# Altium PCB SportsLight_ASCII.PcbDoc
Units mil, origin at the board's own origin, x right, y up, seen from the top; angles counter-clockwise.
Board outline 1948.82 x 1181.1 mil, 2 copper layers (Top Layer, Bottom Layer); 64 components, 41 nets, 217 pads, 75 vias.
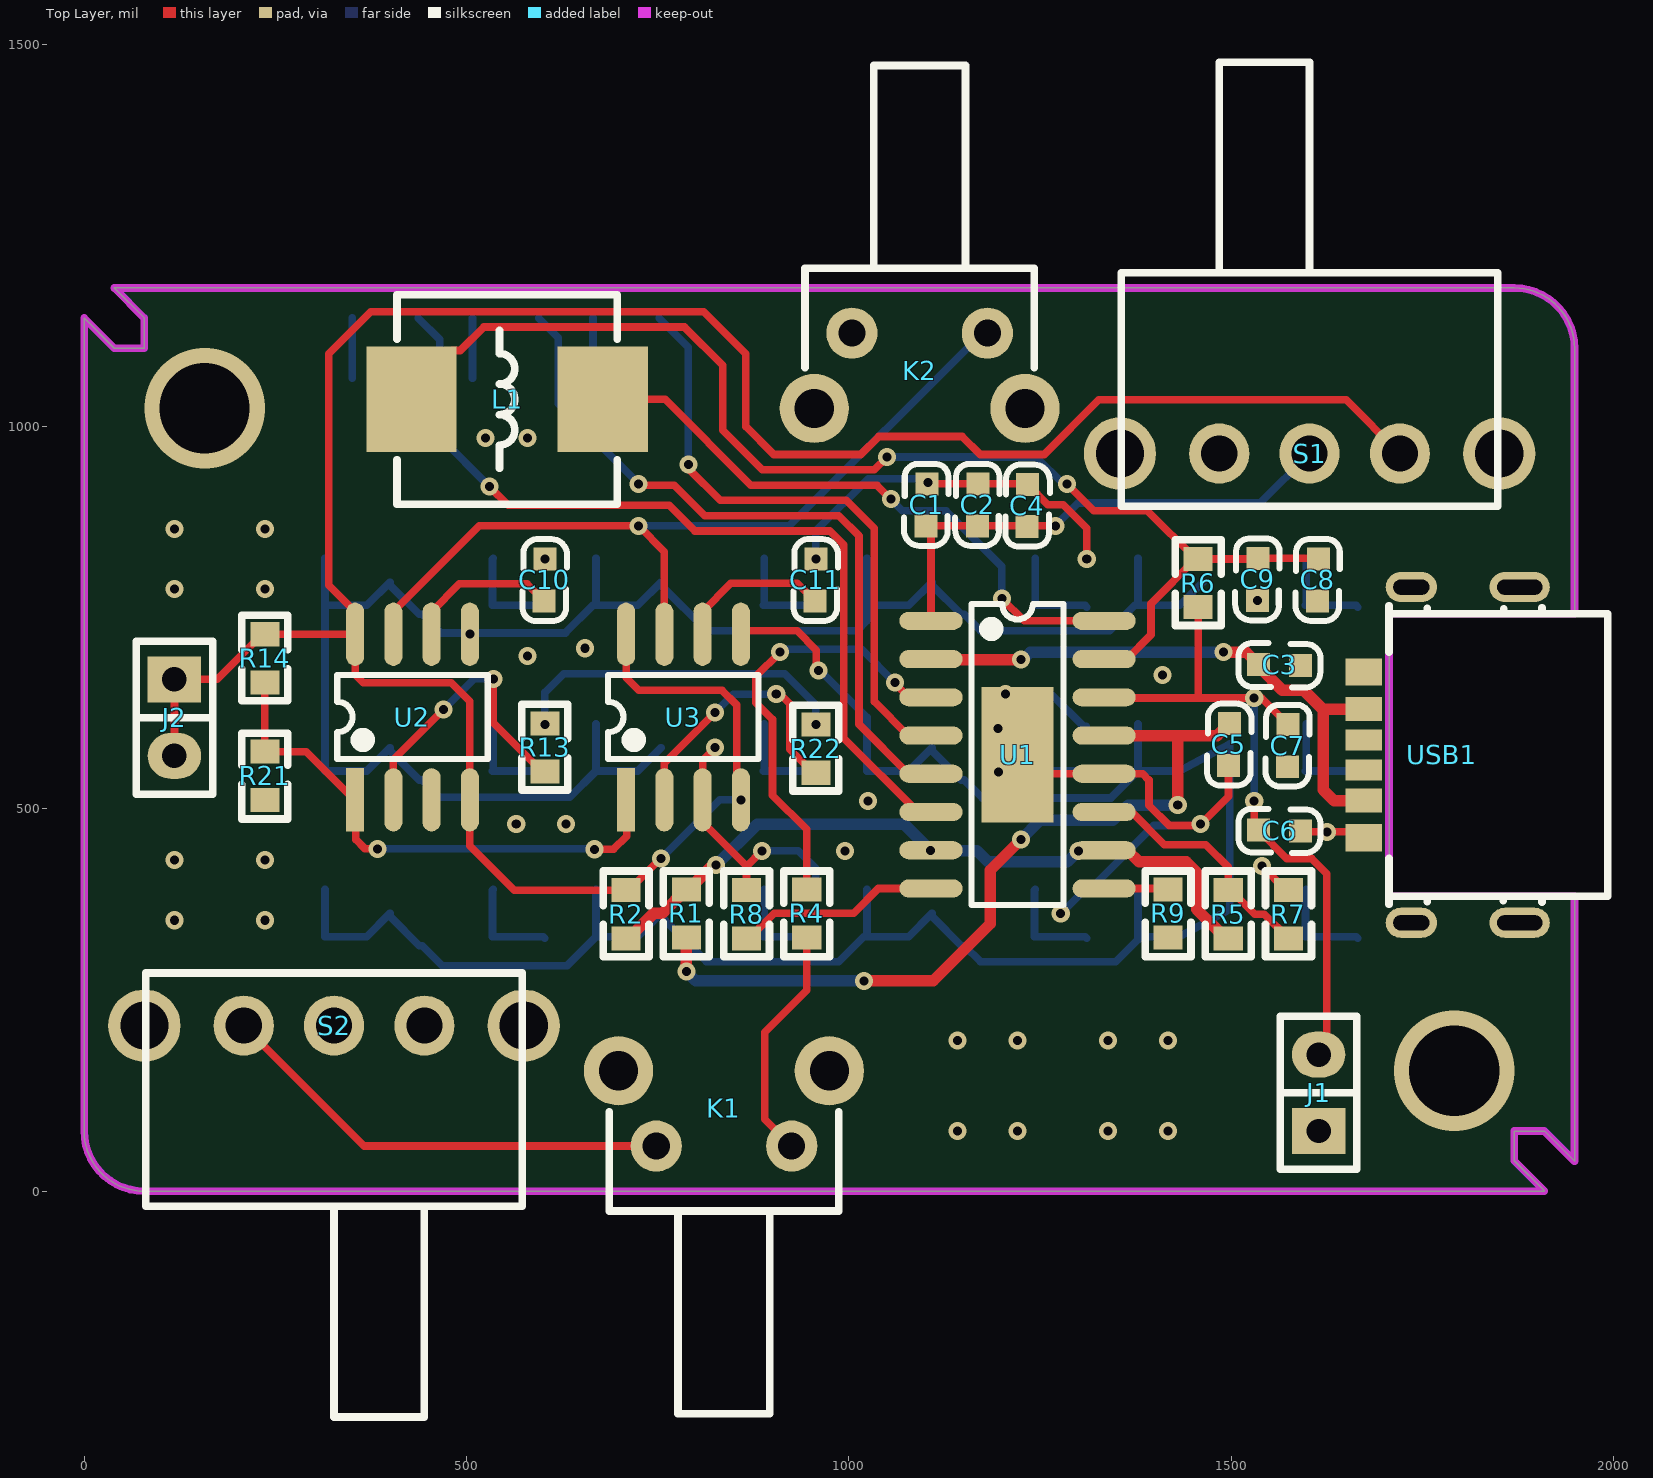
[diagram p0: Top Layer view]
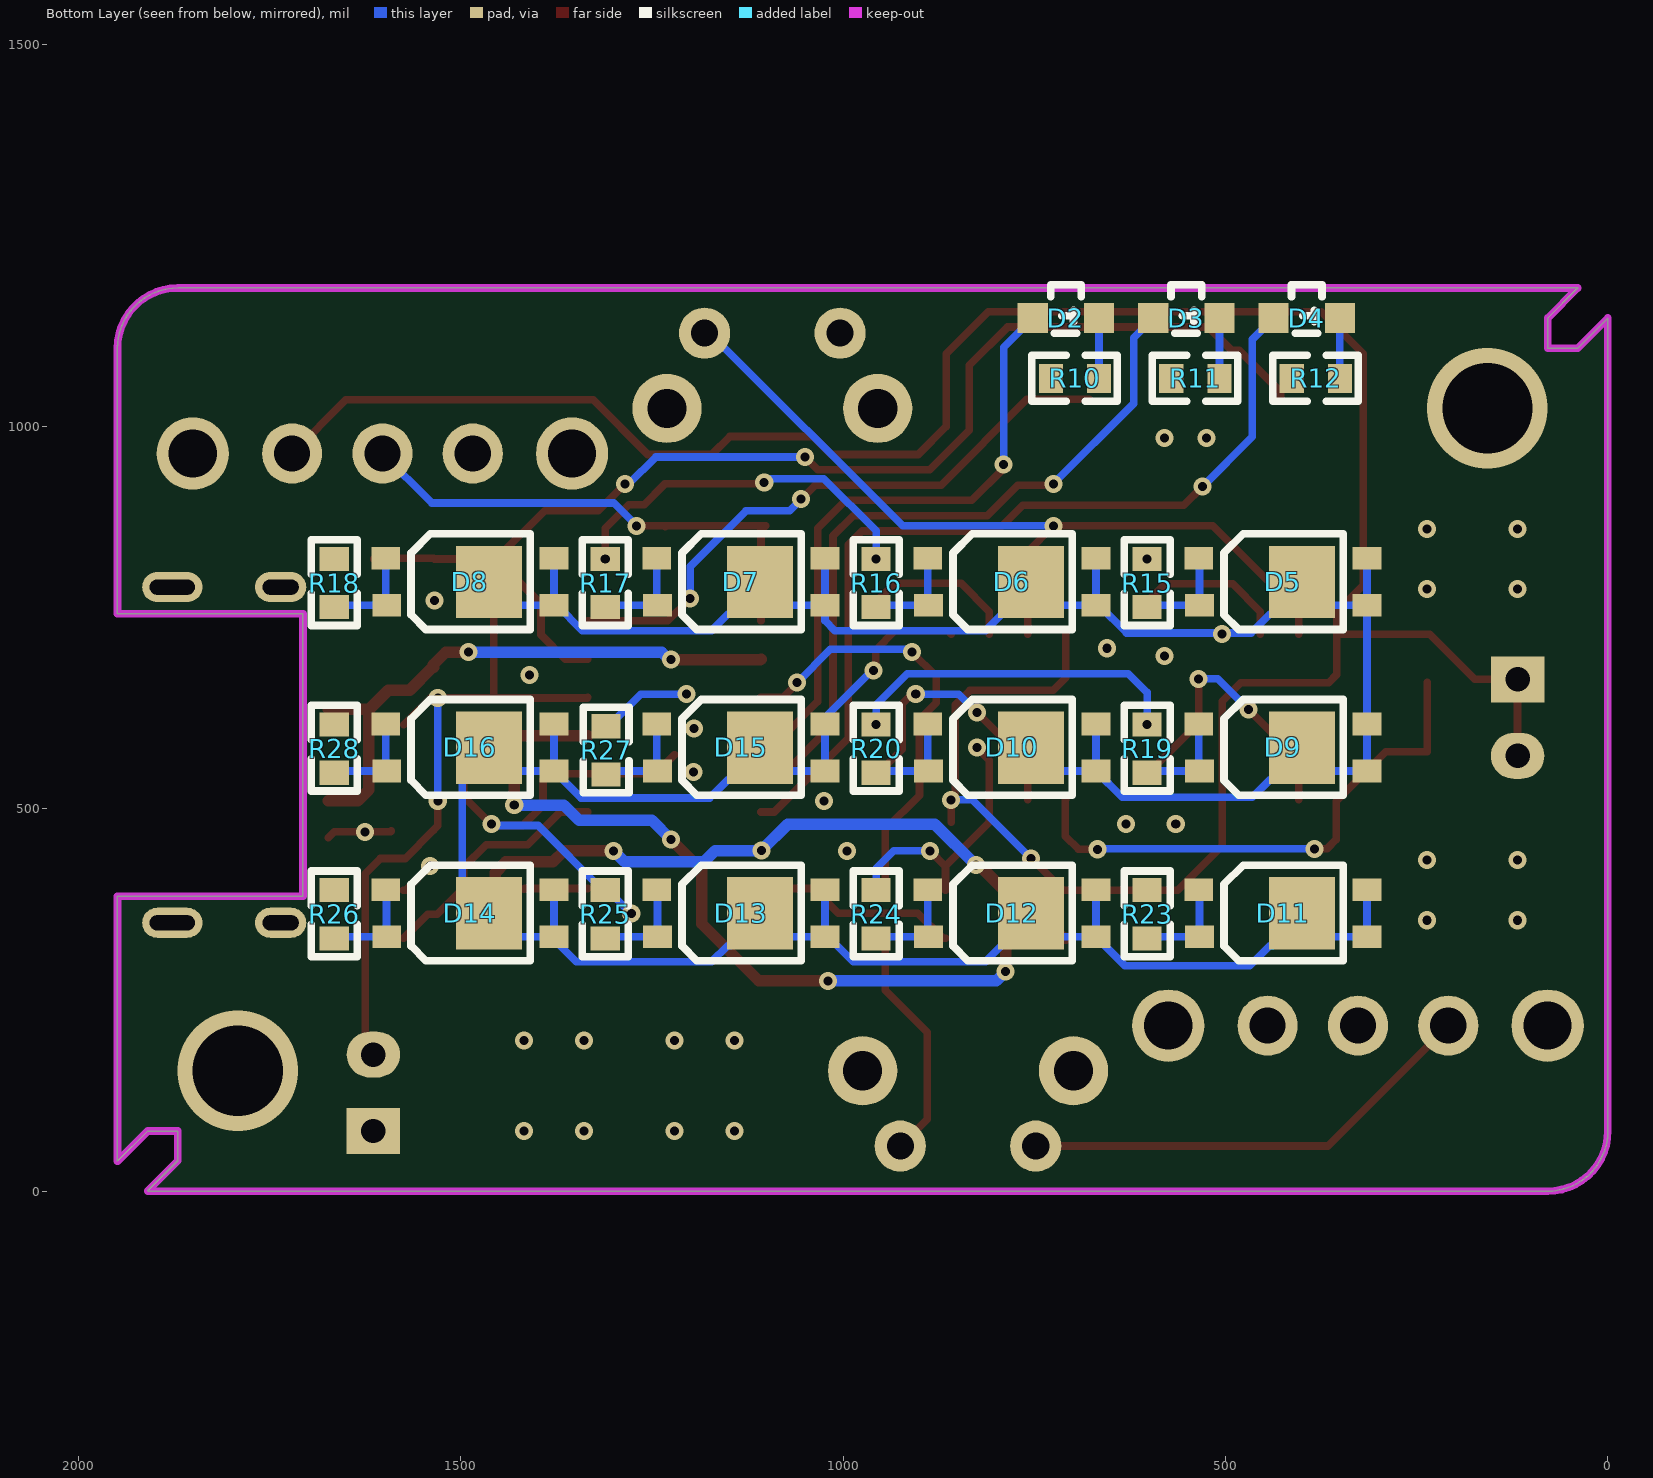
[diagram p1: Bottom Layer view, seen from below]

## Layer stack, top to bottom
Top Solder: solder mask 0.4, Solder Resist, Dk 3.5
Top Layer: signal copper 1.4
Dielectric 1: dielectric 12.6, FR-4, Dk 4.8
Bottom Layer: signal copper 1.4
Bottom Solder: solder mask 0.4, Solder Resist, Dk 3.5

## Board outline
39.37,1102.36 0,1141.73 0,78.74 ccw(c78.74,78.74) 78.74,0 1909.44,0 1909.44,0.56 1870.08,39.92 1870.08,78.74 1909.45,78.74 1948.82,39.37 1948.82,385.51 1706.3,385.51 1706.3,755 1948.82,755 1948.82,1102.36 ccw(c1870.08,1102.36) 1870.08,1181.1 39.37,1181.1 78.74,1141.73 78.74,1102.36

## Design rules (kind name [scope] priority, off if disabled: settings)
AssemblyTestPointUsage [All] p0: scope1count=1 scope1_0_kind=Board scope1_0_value=Board scope2count=1 scope2_0_kind=Board scope2_0_value=Board commentlength=0
AssemblyTestpoint [All] p0: scope1count=1 scope1_0_kind=Board scope1_0_value=Board scope2count=1 scope2_0_kind=Board scope2_0_value=Board commentlength=0
Clearance [All] p0: scope1count=1 scope1_0_kind=Board scope1_0_value=Board scope2count=1 scope2_0_kind=Board scope2_0_value=Board commentlength=0 gap=10
Clearance [All] p1: gap=10 ignorepadtopadclearanceinfootprint=TRUE except(0: Arc-Hole Track-Hole SMDPad-Hole THPad-Hole Via-Hole Fill-Hole Poly-Hole Region-Hole Text-Hole; 15: Arc-Fill Arc-Poly Arc-Region Track-Fill Track-Poly Track-Region)
ComponentClearance [All] p0: scope1count=1 scope1_0_kind=Board scope1_0_value=Board scope2count=1 scope2_0_kind=Board scope2_0_value=Board commentlength=0 gap=10 collisioncheckmode=3
DiffPairsRouting [All] p0: scope1count=1 scope1_0_kind=Board scope1_0_value=Board scope2count=1 scope2_0_kind=Board scope2_0_value=Board commentlength=0
DiffPairsRouting [All] p1: maxlimit=10 minlimit=3.5 mostfreqgap=10 toplayer_minwidth=3.5 toplayer_maxwidth=15 toplayer_prefwidth=15 bottomlayer_minwidth=3.5 bottomlayer_maxwidth=15 bottomlayer_prefwidth=15 maxuncoupledlength=500
FabricationTestPointUsage [All] p0: scope1count=1 scope1_0_kind=Board scope1_0_value=Board scope2count=1 scope2_0_kind=Board scope2_0_value=Board commentlength=0 valid=0 allowmultiple=FALSE
FabricationTestpoint [All] p0: scope1count=1 scope1_0_kind=Board scope1_0_value=Board scope2count=1 scope2_0_kind=Board scope2_0_value=Board commentlength=0 side=3 testpointundercomponent=TRUE minsize=40 maxsize=100 preferedsize=60 minholesize=0 maxholesize=40 preferedholesize=32 testpointgrid=1
FanoutControl Fanout_BGA [All] p0 off: scope1count=1 scope1_0_kind=Board scope1_0_value=Board scope2count=1 scope2_0_kind=Board scope2_0_value=Board commentlength=69 // Protel DXP Scope 1 Expression Was: IsBGA   Fanout_BGA (Default Rule)
FanoutControl Fanout_LCC [All] p0 off: scope1count=1 scope1_0_kind=Board scope1_0_value=Board scope2count=1 scope2_0_kind=Board scope2_0_value=Board commentlength=69 // Protel DXP Scope 1 Expression Was: IsLCC   Fanout_LCC (Default Rule)
FanoutControl Fanout_SOIC [All] p0 off: scope1count=1 scope1_0_kind=Board scope1_0_value=Board scope2count=1 scope2_0_kind=Board scope2_0_value=Board commentlength=71 // Protel DXP Scope 1 Expression Was: IsSOIC   Fanout_SOIC (Default Rule)
FanoutControl Fanout_Small [All] p0 off: scope1count=1 scope1_0_kind=Board scope1_0_value=Board scope2count=1 scope2_0_kind=Board scope2_0_value=Board commentlength=84 // Protel DXP Scope 1 Expression Was: (CompPinCount < 5)   Fanout_Small (Default Rule)
FanoutControl Fanout_Default [All] p0: scope1count=1 scope1_0_kind=Board scope1_0_value=Board scope2count=1 scope2_0_kind=Board scope2_0_value=Board commentlength=30 // Fanout_Default (Default Rule)
Height [All] p0: scope1count=1 scope1_0_kind=Board scope1_0_value=Board scope2count=1 scope2_0_kind=Board scope2_0_value=Board commentlength=0
HoleSize [All] p0: scope1count=1 scope1_0_kind=Board scope1_0_value=Board scope2count=1 scope2_0_kind=Board scope2_0_value=Board commentlength=0 absolutevalues=TRUE maxlimit=248.03 minlimit=7.87 maxpercent=80.000 minpercent=20.000
HoleSize [All] p1: absolutevalues=TRUE maxlimit=248.03 minlimit=7.87 maxpercent=80.000 minpercent=20.000
HoleToHoleClearance [All] p0: scope1count=1 scope1_0_kind=Board scope1_0_value=Board scope2count=1 scope2_0_kind=Board scope2_0_value=Board commentlength=0
LayerPairs [All] p0: scope1count=1 scope1_0_kind=Board scope1_0_value=Board scope2count=1 scope2_0_kind=Board scope2_0_value=Board commentlength=0 enforce=TRUE
MinimumSolderMaskSliver [All] p0: scope1count=1 scope1_0_kind=Board scope1_0_value=Board scope2count=1 scope2_0_kind=Board scope2_0_value=Board commentlength=0
MinimumSolderMaskSliver [All] p1: minsoldermaskwidth=0
NetAntennae [All] p0: scope1count=1 scope1_0_kind=Net scope1_0_value="No Net" scope2count=1 scope2_0_kind=Board scope2_0_value=Board commentlength=0
NetAntennae [InNet('No Net')] p1: netantennaetolerance=0
PasteMaskExpansion [All] p0: scope1count=1 scope1_0_kind=Board scope1_0_value=Board scope2count=1 scope2_0_kind=Board scope2_0_value=Board commentlength=0 expansion=0
PlaneClearance [All] p0: scope1count=1 scope1_0_kind=Board scope1_0_value=Board scope2count=1 scope2_0_kind=Board scope2_0_value=Board commentlength=0 clearance=20
PlaneConnect [All] p0: scope1count=1 scope1_0_kind=Board scope1_0_value=Board scope2count=1 scope2_0_kind=Board scope2_0_value=Board commentlength=0 planeconnectstyle=Relief reliefexpansion=20 reliefentries=4 reliefconductorwidth=10 reliefairgap=10
PolygonConnect [All] p0: scope1count=1 scope1_0_kind=Board scope1_0_value=Board scope2count=1 scope2_0_kind=Board scope2_0_value=Board commentlength=0 connectstyle=Relief reliefconductorwidth=10 reliefentries=4 polygonreliefangle="90 Angle"
PolygonConnect [All] p1: connectstyle=Relief reliefconductorwidth=10 reliefentries=4 polygonreliefangle="90 Angle" airgapwidth=10
RoutingCorners [All] p0: scope1count=1 scope1_0_kind=Board scope1_0_value=Board scope2count=1 scope2_0_kind=Board scope2_0_value=Board commentlength=0 cornerstyle=45-Degree minsetback=100 maxsetback=100
RoutingLayers [All] p0: scope1count=1 scope1_0_kind=Board scope1_0_value=Board scope2count=1 scope2_0_kind=Board scope2_0_value=Board commentlength=0 top layer=Automatic bottom layer=Automatic
RoutingPriority [All] p0: scope1count=1 scope1_0_kind=Board scope1_0_value=Board scope2count=1 scope2_0_kind=Board scope2_0_value=Board commentlength=0
RoutingTopology [All] p0: scope1count=1 scope1_0_kind=Board scope1_0_value=Board scope2count=1 scope2_0_kind=Board scope2_0_value=Board commentlength=0 topology=Shortest
RoutingVias [All] p0: scope1count=1 scope1_0_kind=Board scope1_0_value=Board scope2count=1 scope2_0_kind=Board scope2_0_value=Board commentlength=0 holewidth=28 width=50 viastyle="Through Hole" minholewidth=11.81 minwidth=19.68 maxholewidth=248.03 maxwidth=255.91
RoutingVias [All] p1: holewidth=28 width=50 viastyle="Through Hole" minholewidth=11.81 minwidth=19.68 maxholewidth=248.03 maxwidth=255.91
ShortCircuit [All] p0: scope1count=1 scope1_0_kind=Board scope1_0_value=Board scope2count=1 scope2_0_kind=Board scope2_0_value=Board commentlength=0 allowed=FALSE
SilkToBoardRegionClearance [All] p0: scope1count=1 scope1_0_kind=Board scope1_0_value=Board scope2count=1 scope2_0_kind=Board scope2_0_value=Board commentlength=0
SilkToSilkClearance [All] p0: scope1count=1 scope1_0_kind=Board scope1_0_value=Board scope2count=1 scope2_0_kind=Board scope2_0_value=Board commentlength=0
SilkToSolderMaskClearance [All] p0 off: scope1count=1 scope1_0_kind=Board scope1_0_value=Board scope2count=1 scope2_0_kind=Board scope2_0_value=Board commentlength=44 // Protel DXP Scope 1 Expression Was: IsPad
SilkToSolderMaskClearance [IsPad] p1: minsilkscreentomaskgap=0 clearancetoexposedcopper=TRUE
SolderMaskExpansion [All] p0: scope1count=1 scope1_0_kind=Board scope1_0_value=Board scope2count=1 scope2_0_kind=Board scope2_0_value=Board commentlength=0 expansion=4
SolderMaskExpansion [All] p1: expansion=4
UnRoutedNet [All] p0: scope1count=1 scope1_0_kind=Board scope1_0_value=Board scope2count=1 scope2_0_kind=Board scope2_0_value=Board commentlength=0
UnpouredPolygon [All] p0: scope1count=1 scope1_0_kind=Board scope1_0_value=Board scope2count=1 scope2_0_kind=Board scope2_0_value=Board commentlength=0
Width [All] p0: scope1count=1 scope1_0_kind=Board scope1_0_value=Board scope2count=1 scope2_0_kind=Board scope2_0_value=Board commentlength=0 maxlimit=30 minlimit=3.5 preferedwidth=10
Width [All] p1: maxlimit=30 minlimit=3.5 preferedwidth=10
25 further rules are at their usual default settings.

## Components (designator, comment, footprint, x,y, rotation, side; value= is the part's Value field where it differs from the comment)
C1 "22uF" 0603C 1102.36,925.2 r270 top locked
C2 "22uF" 0603C 1169.29,925.2 r270 top
C3 "10uF" 0603C 1535.43,688.98 r0 top
C4 "10uF" 0603C 1232.28,868.93 r90 top locked
C5 "2.2uF" 0603C 1496.06,556.54 r90 top
C6 "10uF" 0603C 1535.43,472.44 r0 top locked
C7 "0.1uF" 0603C 1574.8,610.24 r270 top
C8 "0.1uF" 0603C 1614.17,826.98 r270 top locked
C9 "10uF" 0603C 1535.43,827.73 r270 top locked
C10 "MODE" 0603C 601.01,771.56 r90 top
C11 "MODE" 0603C 955.34,771.56 r90 top
D2 "" LED-0602-RD 708.66,1141.73 r180 bottom locked
D3 "LED" LED-0602-RD 551.18,1141.73 r180 bottom locked
D4 "LED" LED-0602-RD 393.7,1141.73 r180 bottom locked
D5 "LED-5630" LED-5630W 314.96,826.77 r180 bottom locked
D6 "LED-5630" LED-5630W 669.29,826.77 r180 bottom locked
D7 "LED-5630" LED-5630W 1023.62,826.77 r180 bottom locked
D8 "LED-5630" LED-5630W 1377.95,826.77 r180 bottom locked
D9 "LED-5630" LED-5630W 314.96,610.24 r180 bottom locked
D10 "LED-5630" LED-5630W 669.29,610.24 r180 bottom locked
D11 "LED-5630" LED-5630W 314.96,393.7 r180 bottom locked
D12 "LED-5630" LED-5630W 669.29,393.7 r180 bottom locked
D13 "LED-5630" LED-5630W 1023.62,393.7 r180 bottom locked
D14 "LED-5630" LED-5630W 1377.95,393.7 r180 bottom locked
D15 "LED-5630" LED-5630W 1023.62,610.24 r180 bottom locked
D16 "LED-5630" LED-5630W 1377.95,610.24 r180 bottom locked
J1 "BAT" "Pin HDR1X2/2.54mm-S" 1614.17,78.74 r180 top
J2 "CE" "Pin HDR1X2/2.54mm-S" 118.11,669.29 r0 top locked
K1 "KEY" DIP-6X6X10_C 748.03,59.06 r0 top locked
K2 "KEY" DIP-6X6X10_C 1181.1,1122.05 r180 top locked
L1 "1uH" 0630L 433.07,1035.43 r0 top locked
R1 "0R" 0603R 787.4,331.7 r90 top locked
R2 "0R" 0603R 708.66,393.7 r270 top locked
R4 "10K" 0603R 944.88,331.7 r90 top locked
R5 "MODE" 0603R 1496.06,393.7 r270 top
R6 "10mR" 0603R 1456.69,826.77 r270 top locked
R7 "MODE" 0603R 1574.8,393.7 r270 top
R8 "MODE" 0603R 866.14,393.7 r270 top locked
R9 "MODE" 0603R 1417.32,331.7 r90 top locked
R10 "100R" 0603R 728.35,1062.99 r180 bottom locked
R11 "100R" 0603R 570.87,1062.99 r180 bottom locked
R12 "100R" 0603R 413.39,1062.99 r180 bottom locked
R13 "MODE" 0603R 602.36,611.73 r270 top
R14 "MODE" 0603R 236.22,728.35 r270 top locked
R15 "MODE" 0603R 602.36,826.77 r270 bottom locked
R16 "MODE" 0603R 956.69,826.77 r270 bottom locked
R17 "MODE" 0603R 1311.02,826.77 r270 bottom locked
R18 "MODE" 0603R 1665.35,826.77 r270 bottom locked
R19 "MODE" 0603R 602.36,610.24 r270 bottom locked
R20 "MODE" 0603R 956.69,610.24 r270 bottom locked
R21 "MODE" 0603R 236.22,511.81 r90 top locked
R22 "MODE" 0603R 956.69,610.24 r270 top
R23 "MODE" 0603R 602.36,393.7 r270 bottom locked
R24 "MODE" 0603R 956.69,393.7 r270 bottom locked
R25 "MODE" 0603R 1311.02,393.7 r270 bottom locked
R26 "MODE" 0603R 1665.35,393.7 r270 bottom locked
R27 "MODE" 0603R 1310,607.99 r270 bottom
R28 "MODE" 0603R 1665.35,610.24 r270 bottom locked
S1 "SS-12F23" SS-12F23 1850.39,964.57 r180 top locked
S2 "SS-12F23" SS-12F23 78.74,216.54 r0 top locked
U1 "IP5506" ESOP16 1220.47,570.87 r0 top locked
U2 "CN5730" SOP8 354.33,511.81 r90 top locked
U3 "CN5730" SOP8 708.66,511.81 r90 top locked
USB1 "USB-C 6P CB0.8(073)" USB-C-SMD_TYPE-C-6P-CB0.8-073 1673.23,462.24 r90 top

## Footprints (in the part's own frame and the unit in brackets; to place one, negate y for a bottom-side part, rotate by r counter-clockwise, add the part's x,y. Pads: shape width x height; smd on the part's side, far side on the other; paste and mask are expansions set on the pad)
0603C [mil]
  rect 30x30 smd: 1(0.21,-0.35) 2(55.21,-1.35)
  silkscreen extent -26,-30 81,28
0603R [mm]
  rect 0.8x0.965 smd: 1(0,0) 2(1.6,0)
  silkscreen extent -0.64,-0.76 2.21,0.76
0630L [mm]
  rect 3x3.5 smd: 1(-0.127,0) 2(6.223,0)
  silkscreen extent -0.61,-3.48 6.71,3.48
DIP-6X6X10_C [mm]
  round 2.3 hole 1.3: 0(-1.25,2.5) 0(5.75,2.5)
  round 1.7 hole 0.9: 1(0,0) 3(4.5,0)
  silkscreen extent -1.56,-8.89 6.06,1.14
ESOP16 [mm]
  oval 2.1x0.6 smd: 1(-2.875,4.445) 2(-2.875,3.175) 3(-2.875,1.905) 4(-2.875,0.635) 5(-2.875,-0.635) 6(-2.875,-1.905) 7(-2.875,-3.175) 8(-2.875,-4.445) 9(2.875,-4.445) 10(2.875,-3.175) 11(2.875,-1.905) 12(2.875,-0.635) 13(2.875,0.635) 14(2.875,1.905) 15(2.875,3.175) 16(2.875,4.445)
  rect 0.9x0.7 on Top Paste: 10(-0.625,-0.575) 10(-0.625,0.525) 10(-0.625,1.625) 10(0.625,-1.625) 11(-0.65,-1.625) 11(0.65,-0.575) 11(0.65,0.525) 11(0.65,1.625)
  rect 2.4x4.5 smd paste-3: 17(0,0)
  silkscreen extent -1.52,-5 1.52,5
LED-0602-RD [mm]
  rect 1x1 smd: 1(-1.1,0) 2(1.1,0)
  silkscreen extent -0.51,-0.51 0.51,1.11
LED-5630W [mm]
  rect 2.2x2.4 smd: A(-2.159,-0.768)
  rect 0.95x0.75 smd: A(0,-1.543) A(0,0.019) K(-5.588,0.019) K(-5.563,-1.543)
  silkscreen extent -4.75,-2.34 -0.79,0.83
"Pin HDR1X2/2.54mm-S" [mil]
  rect 70x60 hole 32: 1(0,0)
  oval 70x60 hole 32: 2(0,-100)
  silkscreen extent -50,-150 50,50
SOP8 [mm]
  rect 2.1x0.6 smd: 1(0,0)
  oval 2.1x0.6 smd: 2(0,-1.27) 3(0,-2.54) 4(0,-3.81) 5(5.5,-3.81) 6(5.5,-2.54) 7(5.5,-1.27) 8(5.5,0)
  silkscreen extent 1.35,-4.41 4.15,0.6
SS-12F23 [mm]
  round 2.4 hole 1.6: 0(0,0) 0(12.6,0)
  round 2 hole 1.2: 1(3.3,0) 2(6.3,0) 3(9.3,0)
  silkscreen extent 0.05,-13 12.55,1.75
USB-C-SMD_TYPE-C-6P-CB0.8-073 [mm]
  rect 0.9x1.2 smd: 1(0,0) 6(5.5,0)
  rect 0.8x1.2 smd: 2(1.23,0) 5(4.27,0)
  rect 0.7x1.2 smd: 3(2.25,0) 4(3.25,0)
  oval 1x1.7 hole 0.5 slot 1.2 at 90 deg: 7(-2.825,-1.58) 8(8.325,-1.58)
  oval 1x2 hole 0.5 slot 1.5 at 90 deg: 7(-2.825,-5.18) 8(8.325,-5.18)
  silkscreen extent -2.21,-8.11 7.71,-0.84

## Part data
C1 C2 C3 C4 C5 C6 C7 C8 C9 C10 C11: library part CAP, "无极性电容"
D2: library part LED
J1 J2: library part "Pin HDR1X2"
L1: library part INDUCTOR, "INDUCTOR"
R1 R2 R4 R5 R6 R7 R10 R11 R12 R13 R14 R15 R16 R17 R18 R19 R20 R21 R22 R23 R24 R25 R26 R27 R28: library part RES
R8: library part RES, "用于设置电池容量"
R9: library part RES, "用于设置按键功能、照明"
U1: "集成数码管驱动的2A充电2.4A放电移动电源SOC"
U2 U3: "LED集成驱动电路"

## Via types
v1: diameter 23.62, hole 11.81, Top Layer to Bottom Layer, 73 vias
v2: diameter 157.48, hole 118.11, Top Layer to Bottom Layer, 2 vias

## Nets (pads, with @x,y where several pads share a name; then routed paths per layer and width w, separated by ;. In a path a pad name is that pad's centre, name@x,y a point inside that pad or via, vN(x,y) a via of type N, cw(c..) or ccw(c..) an arc to the next point about the centre after c; other vN are vias at no path point)
BTN: K2.1 U2.7 U3.7 | length 1112.7
  Top Layer w10: U2.7 404.33,757.87 516.46,870 v1(725,870) 758.66,836.34 U3.7
  Bottom Layer w10: v1(725,870) 922.08,870 1174.13,1122.05 K2.1
CE0: J2.1 J2.2 R2.1 R14.1 S1.1 U2.4 U2.8 U3.4 U3.8 | length 3581.6
  Top Layer w10: J2.2 J2.1 173.92,669.29 232.97,728.35 R14.1 U2.8 ; U3.8 708.66,671.34 725,655 834,655 853.19,635.81 853.19,517.29 v1(858.66,511.81) U3.4@858.66,482.28 ; v1(754.1,435) 753.21,435 711.91,393.7 R2.1 562.24,393.7 504.33,451.61 U2.4 504.33,640.67 480,665 365,665 354.33,675.67 U2.8 ; S1.1 1650.04,1035 1326.94,1035 1255.28,963.35 1171.65,963.35 1148.19,986.81 1038.89,986.81 1015.43,963.35 901.65,963.35 865,1000 865,1095 810,1150 375,1150 320,1095 320,792.2 354.33,757.87 U2.8
  Bottom Layer w10: v1(754.1,435) 830.92,511.81 v1(858.66,511.81)
GND: C1.1 C2.1 C3.2 C4.2 C5.1 C6.2 C7.2 C8.2 C9.2 C10.2 C11.2 J1.1 K2.3 R7.1 R8.1 R9.1 R10.1 R11.1 R12.1 R13.1 R15.1 R16.1 R17.1 R18.1 R19.1 R20.1 R21.1 R22.1 R23.1 R24.1 R25.1 R26.1 R27.1 R28.1 S2.2 U1.12 U1.17 U2.3 U3.3 USB1.1 USB1.6 USB1.7 USB1.8 | length 2168.2
  Top Layer w10: v1(825,580) 808.66,563.66 U3.3 808.66,482.28 866.14,424.81 ; R8.1 866.14,424.81 ; v1(886.58,445) 886.34,445 866.14,424.81 ; C1.1 C2.1 1232.8,924.98 C4.2 1260.16,897.63 1280.29,897.63 1311.02,866.89 v1(1311.02,826.77) ; U1.17 1245.47,545.87 U1.12 1384.13,545.87 1392.35,537.65 1392.35,504.74 1418.89,478.19 1458.19,478.19 v1(1460,480) 1496.42,516.42 C5.1 ; v1@1539.95,426.45 v1(1539.95,425.3) 1571.55,393.7 R7.1 ; C6.2 1591.73,470 v1(1625,470) 1665.47,470 USB1.1
  Bottom Layer w10: v1(602.36,610.24) 602.36,652.05 627.12,676.81 916.11,676.81 956.69,636.22 v1(956.69,610.24) ; v1(886.58,445) 933.75,445 956.69,422.05 R24.1 ; v1(956.69,826.77) 956.69,863.39 1025.12,931.81 1095.18,931.81 v1@1102.01,924.98 ; v1(1205,650) 1264.74,650 1306.75,607.99 R27.1 ; v1(1276.98,362.9) 1307.78,393.7 R25.1 1314.27,393.7 1398.76,478.19 1458.19,478.19 v1(1460,480)
  other v1: 118.11,354.33 236.22,354.33 118.11,433.07 236.22,433.07 995,445 565,480 630,480 1025,510 1195.87,548.23 1195,605 1410,675 580,700 655,710 1534.08,772.52 118.11,787.4 236.22,787.4 602.36,826.77 118.11,866.14 236.22,866.14 1103.12,926.69 525,985 580,985
  other v2: 1791.34,157.48 157.48,1023.62
LED4: D3.1 U1.5 | length 954.4
  Top Layer w10: v1(725,925) 726.65,923.35 771.65,923.35 811.65,883.35 986.65,883.35 1013.19,856.81 1013.19,610.43 1077.76,545.87 U1.5
  Bottom Layer w10: D3.1 620,1116.22 620,1030 v1(725,925)
LED5: D2.1 U1.4 | length 807
  Top Layer w10: v1(790,950) 790,945 831.65,903.35 996.65,903.35 1033.19,866.81 1033.19,640.43 1077.76,595.87 U1.4
  Bottom Layer w10: D2.1 790,1103.7 v1(790,950)
MODE: R14.2 R21.2 U2.1 U3.1 | length 700.7
  Top Layer w10: R14.2 R21.2 290.2,574.8 355,510 355,460 367.23,447.77 v1(383.61,447.77) ; v1(667.14,447.14) 692.14,447.14 709.33,464.33 709.33,511.14 U3.1
  Bottom Layer w10: v1(383.61,447.77) 666.5,447.77 v1(667.14,447.14)
NetC1_2: C1.2 C2.2 C4.1 S1.2 U1.1 | length 668.5
  Top Layer w10: U1.1 1107.28,863.71 C1.2 C2.2 C4.1@1233.49,870 ; C4.1 C4.1@1233.49,870 ; v1(1270,870) C4.1@1233.49,870
  Bottom Layer w10: v1(1270,870) 1300,900 1537.8,900 S1.2
NetC6_1: C6.1 C7.1 J1.2 R6.2 U1.14 | length 902.5
  Top Layer w10: U1.14 1334.53,645 v1(1530,645) 1539.47,645 C7.1 ; 1456.69,645.87 R6.2 ; v1(1530,510) 1530,477.73 C6.1 1572.73,435 1605,435 1625,415 1625,189.57 J1.2
  Bottom Layer w10: v1(1530,510) v1(1530,645)
NetC8_1: C8.1 C9.1 L1.1 R6.1 U1.15 | length 1615.1
  Top Layer w10: L1.1 428.07,1045.28 482.13,1099.33 491.97,1099.33 522.64,1130 785,1130 835,1080 835,995 886.65,943.35 1033.35,943.35 v1(1050,960) ; v1(1285,925) 1320,890 1390.22,890 1453.45,826.77 1395,768.33 1395,727.68 1363.19,695.87 U1.15 ; R6.1 1534.33,826.77 C9.1 1613.07,827.52 C8.1
  Bottom Layer w10: v1(1050,960) 1245,960 1280,925 v1(1285,925)
NetC10_1: C10.1 U2.6 | length 200.9
  Top Layer w10: U2.6 454.33,757.87 490.6,794.15 578.99,794.15 C10.1
NetC11_1: C11.1 U3.6 | length 201.6
  Top Layer w10: U3.6 808.66,757.87 845.79,795 932.46,795 C11.1
NetD2_K: D2.2 R10.2 | length 78.7
  Bottom Layer w10: R10.2 D2.2
NetD3_K: D3.2 R11.2 | length 78.7
  Bottom Layer w10: R11.2 D3.2
NetD4_A: D4.1 U1.6 | length 1161.9
  Top Layer w10: v1@530,920 v1(530,921.5) 554.69,896.81 765,896.81 798.46,863.35 975.12,863.35 993.19,845.28 993.19,592.52 1089.84,495.87 U1.6
  Bottom Layer w10: D4.1 465,1113.74 465,986.5 v1(530,921.5)
NetD4_K: D4.2 R12.2 | length 78.7
  Bottom Layer w10: R12.2 D4.2
NetD5_A: D5.A D6.A D7.A D8.A D9.A D10.A U2.5 | length 2372.5
  Bottom Layer w10: D5.A@314.96,827.52 D5.A@314.96,766.02 ; D9.A@400.46,579.49 D9.A@399.96,579.99 ; D10.A@669.29,610.99 D10.A@669.29,549.49 ; D6.A@669.29,827.52 D6.A@669.29,766.02 ; D10.A@754.29,579.99 723.79,549.49 D10.A@669.29,549.49 ; D7.A@1023.62,827.52 D7.A@1023.62,766.02 ; D8.A@1377.95,827.52 D8.A@1377.95,766.02 ; D8.A@1462.95,796.52 1432.45,766.02 D8.A@1377.95,766.02 ; D5.A@314.96,766.02 369.46,766.02 399.96,796.52 399.96,792.59 438.27,754.28 442.2,754.28 466.48,730 629.33,730 665.36,766.02 D6.A@669.29,766.02 ; D5.A@314.96,766.02 314.96,610.99 314.96,549.49 369.46,549.49 D9.A@399.96,579.99 ; D9.A@399.96,579.99 399.96,576.05 438.27,537.74 442.2,537.74 464.95,515 634.81,515 D10.A@669.29,549.49 ; D6.A@669.29,766.02 723.79,766.02 754.29,796.52 754.29,792.59 813.85,733.03 1010.72,733.03 1023.62,745.94 D7.A@1023.62,766.02 ; D7.A@1023.62,766.02 1078.12,766.02 1108.62,796.52 1108.62,792.59 1146.93,754.28 1150.87,754.28 1172.11,733.03 1341.03,733.03 1374.01,766.02 D8.A@1377.95,766.02
  other v1: 504.33,728.35
NetD5_K: D5.K R15.2 | length 131.2
  Bottom Layer w10: D5.K@534.96,827.52 533.96,826.52 533.96,766.02 600.12,766.02 R15.2
NetD6_K: D6.K R16.2 | length 131.2
  Bottom Layer w10: D6.K@889.29,827.52 889.29,767.02 888.29,766.02 954.45,766.02 R16.2
NetD7_K: D7.K R17.2 | length 131.2
  Bottom Layer w10: D7.K@1243.62,827.52 1243.62,767.02 1242.62,766.02 1308.78,766.02 R17.2
NetD8_K: D8.K R18.2 | length 131.2
  Bottom Layer w10: D8.K@1597.95,827.52 1597.95,767.02 1596.95,766.02 1663.11,766.02 R18.2
NetD9_K: D9.K R19.2 | length 131.2
  Bottom Layer w10: D9.K@534.96,610.99 534.96,550.49 533.96,549.49 600.12,549.49 R19.2
NetD10_K: D10.K R20.2 | length 131.2
  Bottom Layer w10: D10.K@889.29,610.99 889.29,550.49 888.29,549.49 954.45,549.49 R20.2
NetD11_A: D11.A D12.A D13.A D14.A D15.A D16.A U3.5 | length 2725.4
  Top Layer w10: U3.5 863.06,732.75 932.25,732.75 957.51,707.49 957.51,683.16 v1(960,680.68)
  Bottom Layer w10: D11.A@314.96,394.45 314.96,332.95 369.46,332.95 399.96,363.45 399.96,359.51 438.27,321.21 442.2,321.21 468.41,295 631.34,295 D12.A@669.29,332.95 ; D12.A@669.29,394.45 D12.A@669.29,332.95 ; v1(960,680.68) 962.5,680.68 1023.62,619.55 1023.62,610.99 1023.62,549.49 1078.12,549.49 1108.62,579.99 1108.62,576.05 1146.93,537.74 1150.87,537.74 1174.36,514.25 1342.72,514.25 D16.A@1377.95,549.49 ; D13.A@1023.62,394.45 D13.A@1023.62,332.95 ; D14.A@1377.95,394.45 D14.A@1377.95,332.95 ; D16.A@1377.95,610.99 D16.A@1377.95,549.49 ; D12.A@669.29,332.95 723.79,332.95 754.29,363.45 754.29,359.51 813.85,299.96 986.69,299.96 1019.68,332.95 D13.A@1023.62,332.95 ; D13.A@1023.62,332.95 1078.12,332.95 1108.62,363.45 1108.62,359.51 1146.93,321.21 1150.87,321.21 1172.11,299.96 1349.14,299.96 1377.95,328.77 D14.A@1377.95,332.95 ; D14.A@1377.95,332.95 1432.45,332.95 1468.8,352.65 1497.95,368.45 1497.95,584.99 1468.8,569.19 1432.45,549.49 D16.A@1377.95,549.49
NetD11_K: D11.K R23.2 | length 131.2
  Bottom Layer w10: D11.K@534.96,394.45 533.96,393.45 533.96,332.95 600.12,332.95 R23.2
NetD12_K: D12.K R24.2 | length 131.2
  Bottom Layer w10: D12.K@889.29,394.45 889.29,333.95 888.29,332.95 954.45,332.95 R24.2
NetD13_K: D13.K R25.2 | length 131.2
  Bottom Layer w10: D13.K@1243.62,394.45 1242.62,393.45 1242.62,332.95 1308.78,332.95 R25.2
NetD14_K: D14.K R26.2 | length 131.2
  Bottom Layer w10: D14.K@1597.95,394.45 1596.95,393.45 1596.95,332.95 1663.11,332.95 R26.2
NetD15_K: D15.K R27.2 | length 131.2
  Bottom Layer w10: D15.K@1243.62,610.99 1243.62,550.49 1242.62,549.49 1305.51,549.49 R27.2
NetD16_K: D16.K R28.2 | length 131.2
  Bottom Layer w10: D16.K@1597.95,610.99 1597.95,550.49 1596.95,549.49 1663.11,549.49 R28.2
NetK1_1: K1.1 S2.1 | length 604.6
  Top Layer w10: S2.1 366.14,59.06 K1.1
NetK1_3: K1.3 R4.1 | length 310
  Top Layer w10: K1.3 890,94.25 890,208.03 944.88,262.92 R4.1
NetL1_2: L1.2 U1.16 | length 800.1
  Top Layer w10: L1.2 759.57,1035.43 871.65,923.35 1036.65,923.35 v1(1055,905) ; v1(1200,775) 1229.13,745.87 U1.16
  Bottom Layer w10: v1(1055,905) 1070,890 1126.91,890 1200,816.91 v1(1200,775)
NetR4_2: R4.2 U1.3 | length 578.2
  Top Layer w10: v1(910,705) 878.19,673.19 878.19,638.89 900,617.08 900,517.92 944.88,473.03 R4.2 ; v1(1060,665) 1060,664.31 1078.45,645.87 U1.3
  Bottom Layer w10: v1(910,705) 910,708.46 1016.54,708.46 v1(1060,665)
NetR5_1: R5.1 R7.2 U1.11@1333.66,495.87 | length 330.3
  Top Layer w10: U1.11@1335.8,493.73 1333.66,495.87 1369.75,495.87 1412.43,453.19 1466.81,453.19 1496.06,423.94 R5.1 1499.31,393.7 1530.81,362.2 1543.31,362.2 R7.2
NetR8_2: R8.2 U1.8 | length 228.8
  Top Layer w10: R8.2 869.39,330.71 902.38,363.7 1006.22,363.7 1038.39,395.87 U1.8@1067.91,395.87
NetR9_2: R9.2 U1.9 | length 84.1
  Top Layer w10: U1.9 1416.15,395.87 R9.2
NetR13_2: R13.2 U2.2 | length 378
  Top Layer w10: U2.2 404.33,564.33 v1(470,630) ; v1(535,670) 535,612.85 599.11,548.74 R13.2
  Bottom Layer w10: v1(470,630) 510,670 v1(535,670)
NetR22_2: R22.2 U3.2 | length 360.7
  Top Layer w10: U3.2 758.66,559.75 v1(825,626.09) ; v1(905,650) 910,650 922.7,637.3 922.7,577.99 953.44,547.24 R22.2
  Bottom Layer w10: v1(825,626.09) 848.91,650 v1(905,650)
VBUS: C3.1 U1.2 USB1.2 USB1.5 | length 765
  Top Layer w15: U1.2 1108.15,695 v1(1225,695) ; v1(1490,705) 1519.27,705 C3.1 ; C3.1@1535,685 1536.9,685 1566.77,655.12 1594.88,655.12 1619.64,630.36 1620,630.36 ; USB1.2 1634.33,510.67 1620,525 1620,630.36 ; USB1.5 1620,630.36
  Bottom Layer w15: v1(1225,695) 1227.33,695 1237.33,705 v1(1490,705)
VCC: C5.2 R1.1 U1.13 | length 1089.5
  Top Layer w15: v1(787.4,287.4) R1.1 ; v1(1020,275) 1110,275 1185,350 1185,420 v1(1225,460) ; U1.13 1430,595.87 ; v1(1430,505) 1430,595.87 ; C5.2 1481.54,595.87 1430,595.87
  Bottom Layer w15: v1(787.4,287.4) 799.8,275 v1(1020,275) ; v1(1225,460) 1250,485 1345.29,485 1365.29,505 v1(1430,505)
VCCX: R1.2 R2.2 R5.2 U1.7 U1.10@1333.66,445.87 | length 951.7
  Top Layer w10: v1(1106.85,445.43) U1.7
  Top Layer w15: R2.2 711.91,330.71 744.65,363.45 756.16,363.45 R1.2 790.65,394.69 820.76,424.8 824.8,424.8 v1(826.45,426.45) ; v1(1300,445) 1365,445 1379.31,430.69 1440.82,430.69 1455,416.51 1455,368.52 1492.82,330.71 R5.2
  Bottom Layer w15: v1(826.45,426.45) 880,480 1072.28,480 v1(1106.85,445.43) 1167.14,445.43 1181.88,430.69 1285.69,430.69 v1(1300,445)
pads on no net: K1.0 K2.0 S1.0 S1.3 S2.0 S2.3 U1.10@1195.87,548.23 U1.10@1195.87,591.54 U1.10@1195.87,634.84 U1.10@1245.08,506.89 U1.11@1194.88,506.89 U1.11@1246.06,548.23 U1.11@1246.06,591.54 U1.11@1246.06,634.84 USB1.3 USB1.4
copper on no net:
  other v1: 1141.73,78.74 1220.47,78.74 1338.58,78.74 1417.32,78.74 1141.73,196.85 1220.47,196.85 1338.58,196.85 1417.32,196.85

## Polygon pours and split planes (outlines as drawn)
GND on Top Layer "Top Layer-No Net" (solid, pour order 5): 39.37,1102.36 0,1141.73 0,78.74 ccw(c78.74,78.74) 78.74,0 1909.44,0 1909.44,0.56 1870.08,39.92 1870.08,78.74 1909.45,78.74 1948.82,39.37 1948.82,385.51 1706.3,385.51 1706.3,755 1948.82,755 1948.82,1102.36 ccw(c1870.08,1102.36) 1870.08,1181.1 39.37,1181.1 78.74,1141.73 78.74,1102.36
GND on Bottom Layer "Top Layer-No Net1" (solid, pour order 6): 39.37,1102.36 0,1141.73 0,78.74 ccw(c78.74,78.74) 78.74,0 1909.44,0 1909.44,0.56 1870.08,39.92 1870.08,78.74 1909.45,78.74 1948.82,39.37 1948.82,385.51 1706.3,385.51 1706.3,755 1948.82,755 1948.82,1102.36 ccw(c1870.08,1102.36) 1870.08,1181.1 39.37,1181.1 78.74,1141.73 78.74,1102.36

## Keep-outs
Keep-Out Layer:
  lines w10: 1909.44,0 78.74,0 cw(c78.74,78.74) 0,78.74 0,1141.73 ; 1909.44,0.56 1870.08,39.92 1870.08,78.74 1909.45,78.74 ; 0,1141.73 0,1141.73 ; 0,1141.73 39.37,1102.36 78.74,1102.36 ; 78.74,1102.36 78.74,1141.73 39.37,1181.1 1870.08,1181.1 cw(c1870.08,1102.36) 1948.82,1102.36 1948.82,755 1706.3,755 1706.3,385.51 1948.82,385.51 1948.82,39.37 1909.45,78.74 ; 78.74,1102.36 78.74,1102.36 ; 1909.45,78.74 1909.45,78.74 ; 1909.45,78.74 1909.45,78.74

## Text inside footprints (layer, text, board x,y; h text height)
C11: Mechanical 1 "LED" at 738.16,1008.23 h60